# Altium PCB main.PcbDoc
Units mm, origin at the board's own origin, x right, y up, seen from the top; angles counter-clockwise.
Board outline 32.6 x 32.8 mm, 2 copper layers (Top Layer, Bottom Layer); 4 components, 6 nets, 20 pads, 0 vias.
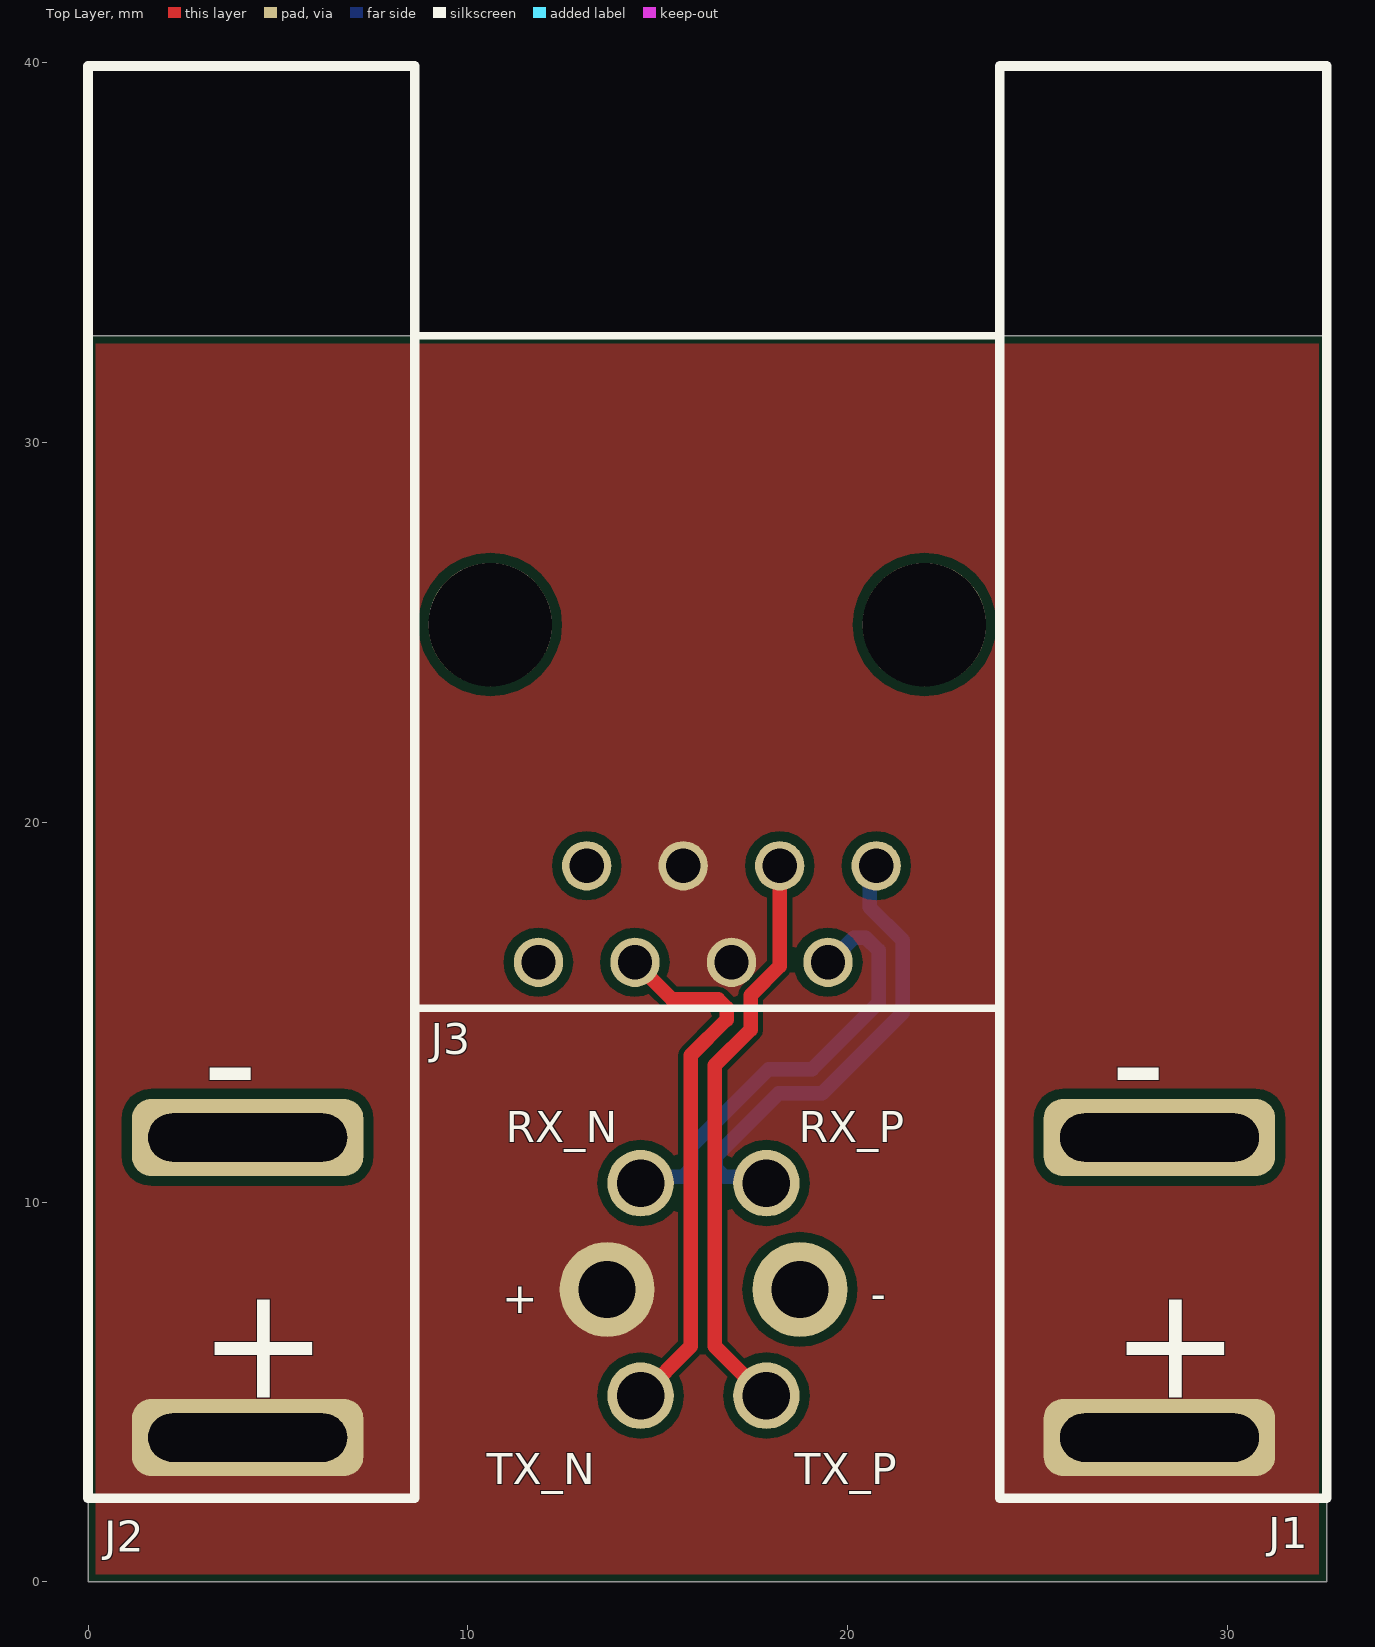
[diagram p0: Top Layer view]
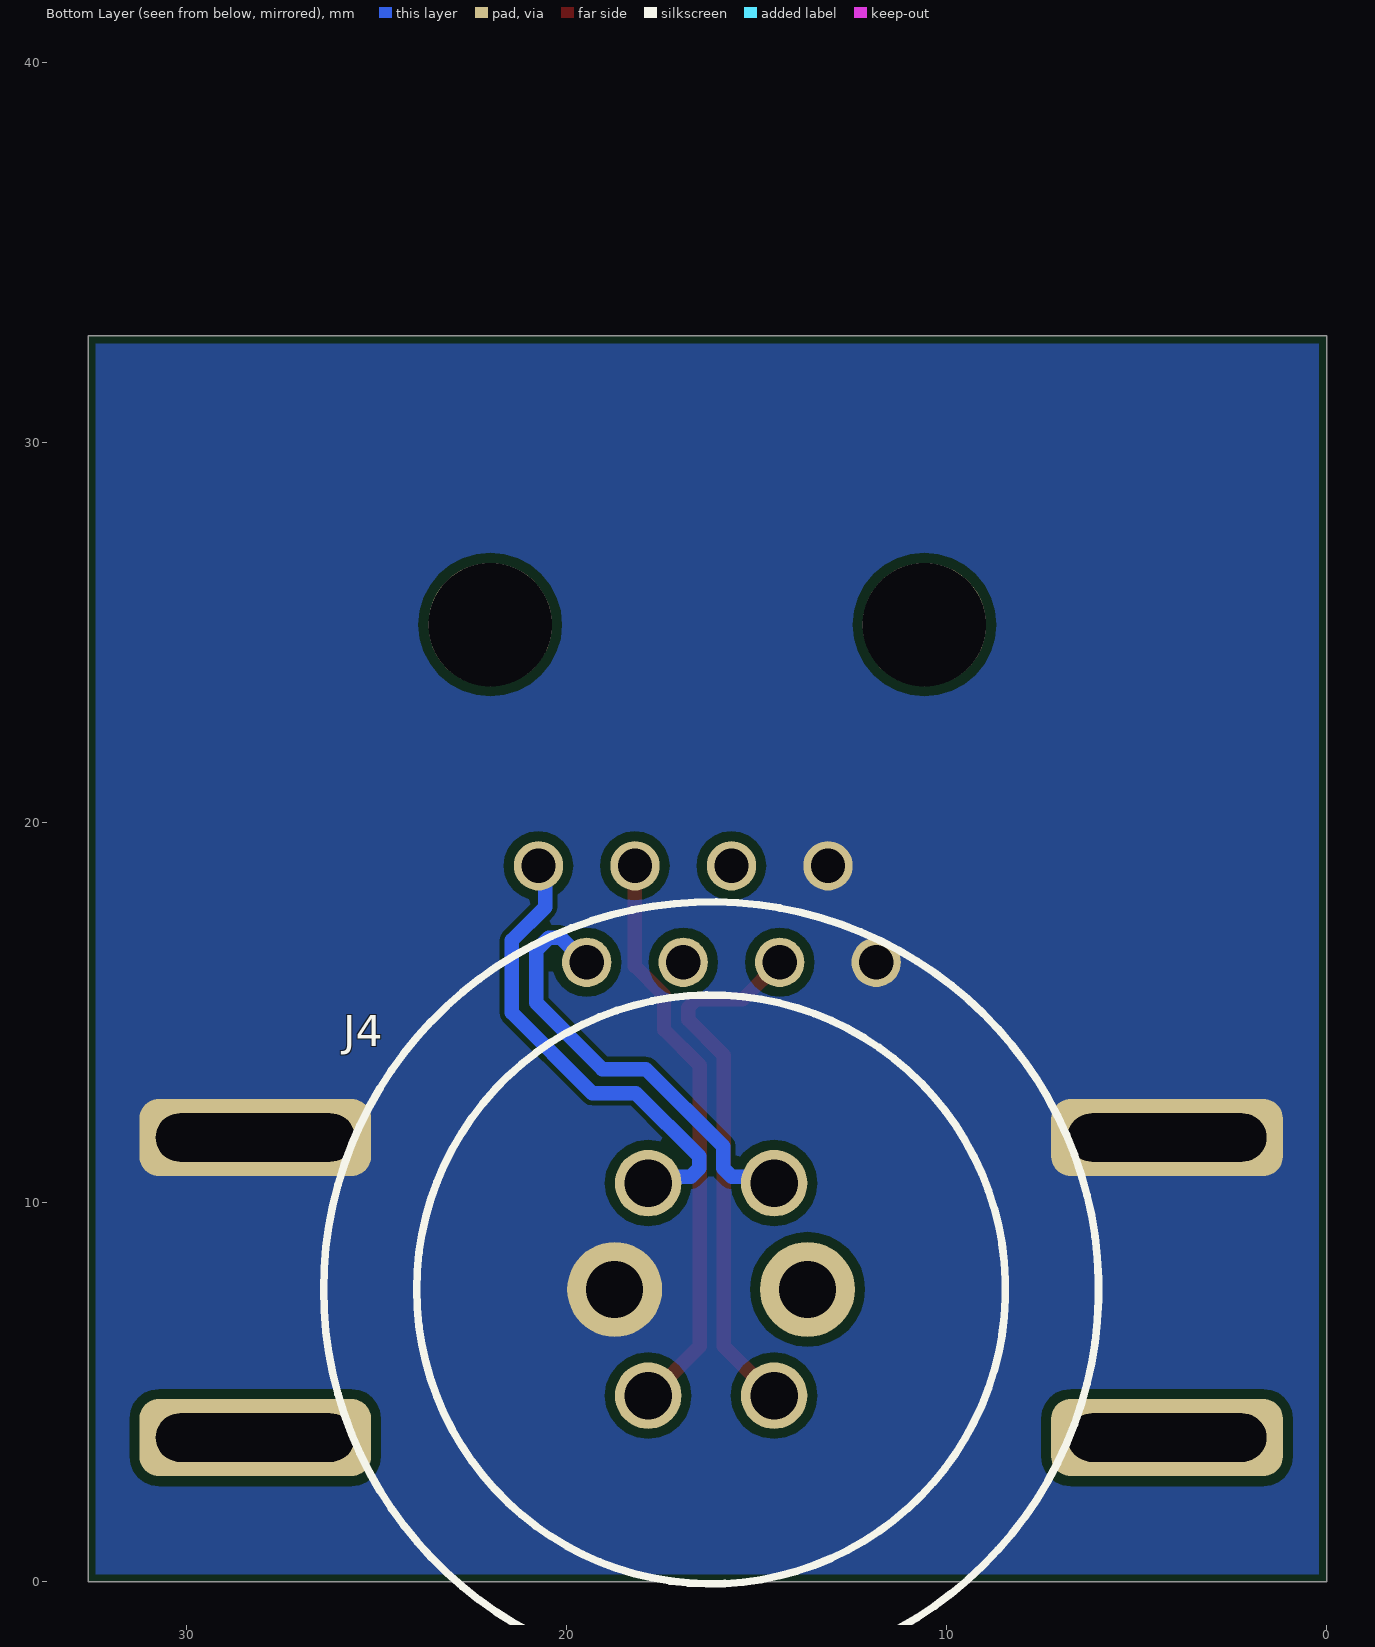
[diagram p1: Bottom Layer view, seen from below]
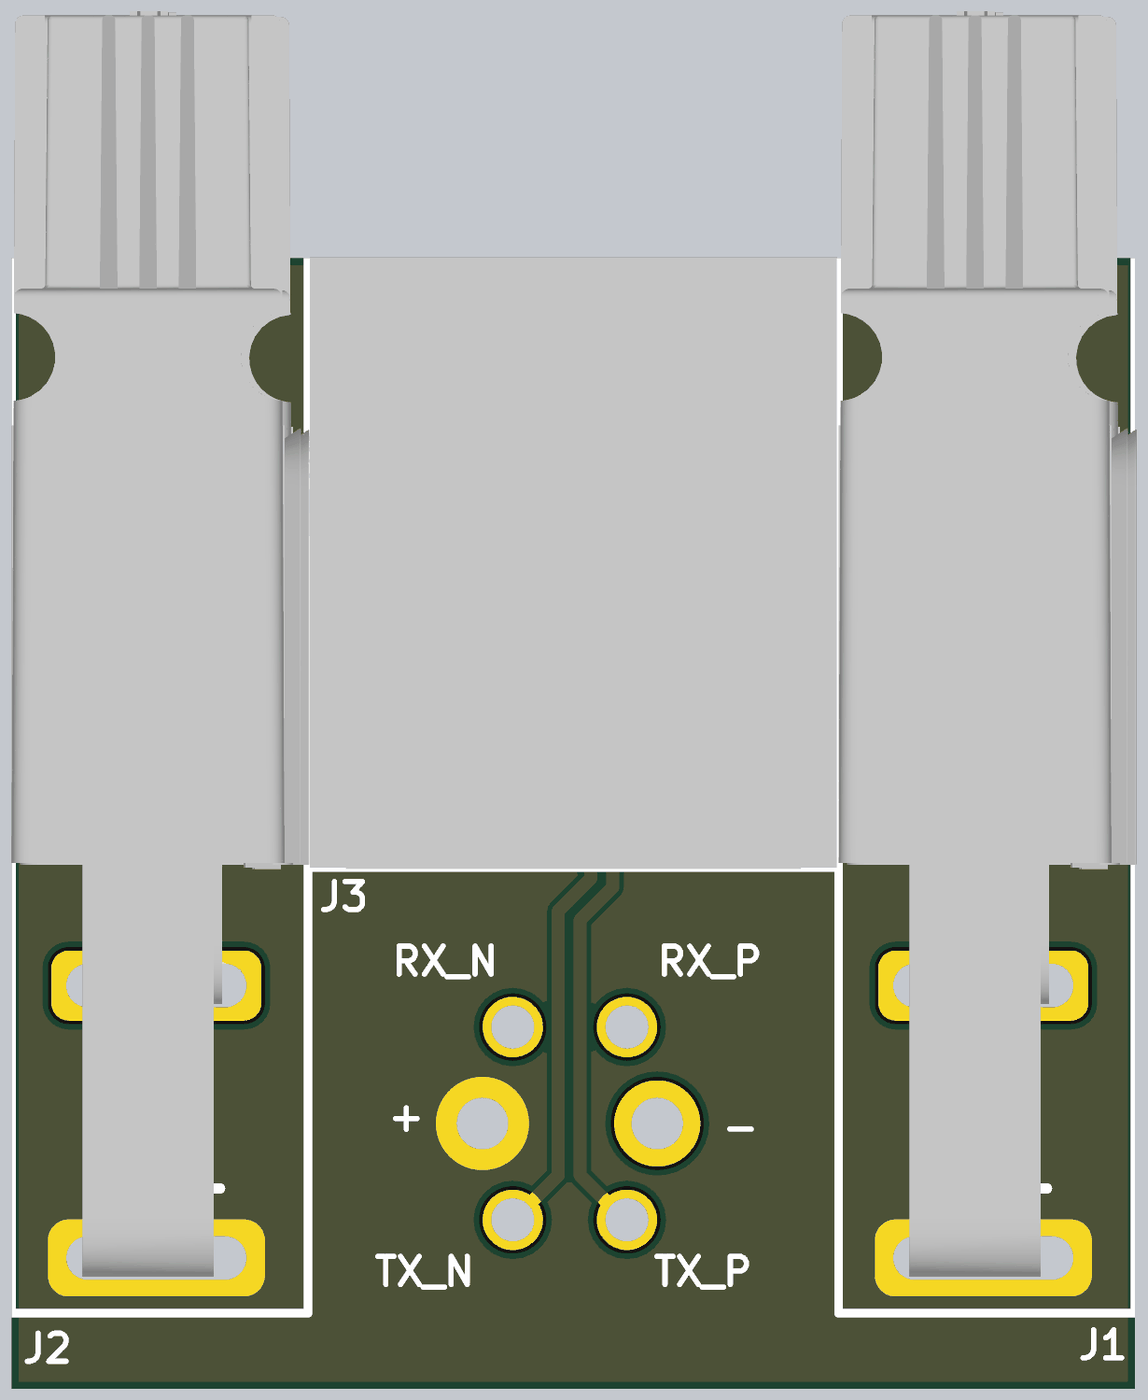
[diagram p2: 3D render of the assembled board from above, using the file's embedded part models]

## Layer stack, top to bottom
Top Solder: solder mask 0.0102, Solder Resist, Dk 3.5
Top Layer: signal copper 0.0356
Dielectric 1: dielectric 0.32, FR-4, Dk 4.8
Bottom Layer: signal copper 0.0356
Bottom Solder: solder mask 0.0102, Solder Resist, Dk 3.5

## Board outline
0,0 0,32.8 32.6,32.8 32.6,0

## Design rules (kind name [scope] priority, off if disabled: settings)
BoardOutlineClearance JLC_BoardOutlineClearance_Silk [OnLayer('Top Overlay')  or   OnLayer('Bottom Overlay')] p1: gap=0 ignorepadtopadclearanceinfootprint=FALSE
BoardOutlineClearance JLC_BoardOutlineClearance_Single [All] p2: gap=0.4 ignorepadtopadclearanceinfootprint=FALSE except(0: Arc-SplitContinuation Track-SplitContinuation SMDPad-SplitContinuation THPad-SplitContinuation Via-SplitContinuation Fill-SplitContinuation Poly-SplitContinuation Region-SplitContinuation Text-SplitContinuation; 0.2: Arc-OutlineEdge Track-OutlineEdge SMDPad-OutlineEdge THPad-OutlineEdge Via-OutlineEdge Fill-OutlineEdge Poly-OutlineEdge Region-OutlineEdge Text-OutlineEdge)
BoardOutlineClearance JLC_BoardOutlineClearance_Panel [All] p3: gap=0.4 ignorepadtopadclearanceinfootprint=FALSE except(0: Arc-SplitContinuation Track-SplitContinuation SMDPad-SplitContinuation THPad-SplitContinuation Via-SplitContinuation Fill-SplitContinuation Poly-SplitContinuation Region-SplitContinuation Text-SplitContinuation)
Clearance JLC_Clearance_SB [(HasFootprint('0603 Solder Bridge-Footprint-1'))] p1: gap=0.127 ignorepadtopadclearanceinfootprint=FALSE except(0: Fill-Hole Poly-Hole Region-Hole Text-Hole; 0.254: SMDPad-Fill SMDPad-Poly SMDPad-Region THPad-Fill THPad-Poly THPad-Region Via-Fill Via-Poly Via-Region)
Clearance JLC_Clearance_Top [All] p2: gap=0.127 ignorepadtopadclearanceinfootprint=FALSE except(0: Fill-Hole Poly-Hole Region-Hole Text-Hole; 0.254: SMDPad-Fill SMDPad-Poly SMDPad-Region THPad-Fill THPad-Poly THPad-Region Via-Fill Via-Poly Via-Region Fill-Fill Fill-Poly Fill-Region Poly-Poly Poly-Region Region-Region)
ComponentClearance JLC_ComponentClearance [All] p1: gap=0 collisioncheckmode=3 verticalgap=0 showdistances=FALSE
ComponentOrientations JLC_ComponentOrientations [All] p1: allowedrotations=32
DiffPairsRouting [All] p1: maxlimit=0.254 minlimit=0.254 mostfreqgap=0.254 toplayer_minwidth=0.381 toplayer_maxwidth=0.381 toplayer_prefwidth=0.381 bottomlayer_minwidth=0.381 bottomlayer_maxwidth=0.381 bottomlayer_prefwidth=0.381 maxuncoupledlength=12.7
Height JLC_Height [All] p1: minheight=0 maxheight=2539.975 prefheight=12.7
HoleSize JLC_HoleSize [All] p1: absolutevalues=TRUE maxlimit=1000 minlimit=0.305 maxpercent=80.000 minpercent=20.000
HoleToHoleClearance JLC_HoleToHoleClearance [All] p1: gap=0.305 allowstackedmicrovias=TRUE
MinimumAnnularRing JLC_MinimumAnnularRing [All] p1: minimumring=0.076
MinimumSolderMaskSliver JLC_MinimumSolderMaskSliver [All] p1: minsoldermaskwidth=0
PolygonConnect [All] p1: connectstyle=Relief reliefconductorwidth=0.254 reliefentries=4 polygonreliefangle="90 Angle" airgapwidth=0.254
RoutingVias JLC_RoutingVias [All] p1: holewidth=0.381 width=0.635 viastyle="Through Hole" minholewidth=0.305 minwidth=0.61 maxholewidth=6.299 maxwidth=12.7
SilkToSilkClearance JLC_SilkToSilkClearance [All] p1: silktosilkclearance=0
SilkToSolderMaskClearance JLC_SilkToSolderMaskClearance [IsPad] p1: minsilkscreentomaskgap=0 clearancetoexposedcopper=TRUE
SolderMaskExpansion [All] p1: expansion=0.102 istentingtop=FALSE
Width JLC_Width [All] p1: maxlimit=12.7 minlimit=0.127 preferedwidth=0.254
22 further rules are at their usual default settings.

## Classes and differential pairs
differential pair TX: +TX_P -TX_N
differential pair RX: +RX_P -RX_N

## Components (designator, comment, footprint, x,y, rotation, side; value= is the part's Value field where it differs from the comment)
J1 "pp45 1x2 horz" "CONN PP45 1x2P HORZ" 28.2,11.7 r180 top
J2 "pp45 1x2 horz" "CONN PP45 1x2P HORZ" 4.2,11.7 r180 top
J3 "rj45 horz unshld" "CONN RJ45 HORZ UNSHLD" 16.3,25.2 r180 top
J4 "miniconx 4+6p" "CONN MINICONX 4+2P" 16.2,7.7 r180 bottom

## Footprints (in the part's own frame and the unit in brackets; to place one, negate y for a bottom-side part, rotate by r counter-clockwise, add the part's x,y. Pads: shape width x height; smd on the part's side, far side on the other; paste and mask are expansions set on the pad)
"CONN MINICONX 4+2P" [mm]
  round 2.5 hole 1.5: 1(-2.537,0) 2(2.537,0)
  round 1.75 hole 1.25: 3(-1.657,2.796) 4(-1.657,-2.796) 5(1.657,-2.796) 6(1.657,2.796)
  silkscreen extent -10.2,-10.2 10.2,10.2, body extent -10.2,-10.2 10.2,10.2, height 17.8
"CONN PP45 1x2P HORZ" [mil] "PowerPole45 vertical"
  rrect50% 240x80 hole 50 slot 206 at 0 deg: 1(0,0) 2(0,311.02)
  silkscreen extent -173,-1110 165,374, body extent -175,-1113 165,332, height 643
"CONN RJ45 HORZ UNSHLD" [mm]
  round 1.3 hole 0.9: 1(-4.445,6.35) 2(-3.175,8.89) 3(-1.905,6.35) 4(-0.635,8.89) 5(0.635,6.35) 6(1.905,8.89) 7(3.175,6.35) 8(4.445,8.89)
  round 3.25 hole 3.25 unplated: ""(-5.715,0) ""(5.715,0)
  silkscreen extent -7.7,-7.6 7.7,10.1, body extent -7.65,-7.62 7.65,10.12, height 12.71

## Part data
J1 J2: library part "CONN pp45 1x2 horz", "Heavy Duty Power Connectors PCB45 HORIZ (TOP) RA LP CONT.", Current Rating=45A, Manufacturer 1="Anderson Power", Manufacturer Part Number 1=1337G1, Supplier Part Number 1=2243-1337G1-ND, Voltage Rating=250V, Category=Connectors, ComponentLink1Description=https://datasheet.ciiva.com/18408/70162076-18408970.pdf?src-supplier=Allied+Electronics, ComponentLink1URL=https://datasheet.ciiva.com/18408/70162076-18408970.pdf?src-supplier=Allied+Electronics, ComponentLink2Description=http://datasheet.octopart.com/1337G1-Anderson-Power-datasheet-41191667.pdf?src-supplier=Farnell, ComponentLink2URL=http://datasheet.octopart.com/1337G1-Anderson-Power-datasheet-41191667.pdf?src-supplier=Farnell, ComponentLink3Description=http://datasheet.octopart.com/1337G1-Anderson-Power-datasheet-64289295.pdf?src-supplier=Element14, ComponentLink3URL=http://datasheet.octopart.com/1337G1-Anderson-Power-datasheet-64289295.pdf?src-supplier=Element14, ComponentLink4Description=http://datasheet.octopart.com/1337G1-Anderson-Power-datasheet-9566536.pdf?src-supplier=Allied+Electronics, ComponentLink4URL=http://datasheet.octopart.com/1337G1-Anderson-Power-datasheet-9566536.pdf?src-supplier=Allied+Electronics, ComponentLink5Description=http://datasheet.octopart.com/1337G1-Anderson-Power-datasheet-41232158.pdf?src-supplier=Allied+Electronics, ComponentLink5URL=http://datasheet.octopart.com/1337G1-Anderson-Power-datasheet-41232158.pdf?src-supplier=Allied+Electronics, ComponentLink6Description=http://datasheet.octopart.com/1337G1-Anderson-Power-datasheet-103682810.pdf?src-supplier=Allied+Electronics, ComponentLink6URL=http://datasheet.octopart.com/1337G1-Anderson-Power-datasheet-103682810.pdf?src-supplier=Allied+Electronics, Contact Material=Copper, Contact Plating=Tin, Gender=Female, Mount="Through Hole", Pricing 1="1=1.22000, 10=1.07100, 25=1.00800, 50=0.96600, 100=0.92400, 250=0.84000, 500=0.75600, 1000=0.67200, 2500=0.60900 (USD)", REACH SVHC="No SVHC", Stock 1=835, Supplier 1=Digi-Key, Supplier 2=Digi-Key, Supplier Part Number 2=2243-1336G1-ND, Termination="Through Hole"
J3: library part "CONN rj45 horz unshld", "CONN MOD JACK 8P8C R/A UNSHLD", Color=Black, Contact Resistance=20mR, Current Rating=1A, Flammability Rating="UL94 V-0", Insulation Resistance=500MR, Manufacturer 1="Amphenol FCI", Manufacturer Part Number 1=54602-908LF, Max Operating Temperature=70°C, Min Operating Temperature=-40°C, Package Quantity=200, Supplier Part Number 1=609-1046-ND, Voltage Rating=1kV, Category="Modular / Ethernet Connectors", ComponentLink1Description=https://datasheet.ciiva.com/7629/1637015-7629184.pdf?src-supplier=Element14, ComponentLink1URL=https://datasheet.ciiva.com/7629/1637015-7629184.pdf?src-supplier=Element14, ComponentLink2Description=https://datasheet.ciiva.com/685/c-bmj-0102-685432.pdf?src-supplier=Digi-Key, ComponentLink2URL=https://datasheet.ciiva.com/685/c-bmj-0102-685432.pdf?src-supplier=Digi-Key, ComponentLink3Description=https://datasheet.ciiva.com/16945/70236834-16945799.pdf?src-supplier=Allied+Electronics, ComponentLink3URL=https://datasheet.ciiva.com/16945/70236834-16945799.pdf?src-supplier=Allied+Electronics, ComponentLink4Description=https://datasheet.ciiva.com/15170/getdatasheetpartid-177828-15170746.pdf?src-supplier=Verical, ComponentLink4URL=https://datasheet.ciiva.com/15170/getdatasheetpartid-177828-15170746.pdf?src-supplier=Verical, Connector Type=Jack,RJ45, Contact Material="Copper Alloy,Copper,Bronze", Contact Plating=Gold, Depth=17.74mm, Direction=Down, Gender=Female, Housing Color=Black, Housing Material=Polyester, Lead Free="Lead Free", Length=15.3mm, Mount="Through Hole", Number of Contacts=8, Number of Ports=1, Number of Positions=8, Number of Positions Loaded=8, Number of Rows=1, Orientation="Right Angle", Packaging=Bulk, Pitch=2.54mm, Pricing 1="1=0.62000, 10=0.58100, 25=0.52280, 50=0.46460, 100=0.44530, 250=0.40656, 500=0.38720, 1000=0.31944, 2500=0.29040 (USD)", Radiation Hardening=No, REACH SVHC="No SVHC", RoHS=Yes, Shielding=Unshielded, Stock 1=40515, Supplier 1=Digi-Key, Termination="Through Hole", Width=15.3mm
J4: library part "CONN miniconx 4+2p vert", "Standard Circular Connector PosLck Pnl Mnt#16#22 PC Cont 6MPins 300", Manufacturer 1=Switchcraft, Manufacturer Part Number 1=W7C81-6PG-P-300, Supplier Part Number 1=468-W7C81-6PG-P-300-ND, ComponentLink1Description=http://datasheet.octopart.com/W7C81-6PG-P-300-Conxall-datasheet-139885749.pdf?src-supplier=Sager+Electronics, ComponentLink1URL=http://datasheet.octopart.com/W7C81-6PG-P-300-Conxall-datasheet-139885749.pdf?src-supplier=Sager+Electronics, Pricing 1="25=8.98000 (USD)", Supplier 1=Digi-Key

## Nets (pads, with @x,y where several pads share a name; then routed paths per layer and width w, separated by ;. In a path a pad name is that pad's centre, name@x,y a point inside that pad or via, vN(x,y) a via of type N, cw(c..) or ccw(c..) an arc to the next point about the centre after c; other vN are vias at no path point)
GND: J1.1 J2.1 J3.7 J3.8 J4.1
HV: J1.2 J2.2 J3.4 J3.5 J4.2
RX_N: J3.2 J4.6 | length 11.7
  Bottom Layer w0.381: J4.6 14.71,10.663 15.659,10.663 15.883,10.887 15.883,11.465 17.918,13.501 19.066,13.501 20.807,15.242 20.807,16.624 20.473,16.957 20.158,16.957 19.511,16.31 J3.2
RX_P: J3.1 J4.3 | length 12.6
  Bottom Layer w0.381: J4.3 17.69,10.663 16.741,10.663 16.518,10.887 16.518,11.202 18.181,12.866 19.329,12.866 21.442,14.978 21.442,16.887 20.569,17.759 20.569,18.674 J3.1
TX_N: J3.6 J4.5 | length 14.1
  Top Layer w0.381: J3.6 15.363,15.342 16.582,15.342 16.806,15.119 16.806,14.804 15.865,13.863 15.865,6.2 14.569,4.904 J4.5
TX_P: J3.3 J4.4 | length 15.3
  Top Layer w0.381: J4.4 17.796,4.904 16.5,6.2 16.5,13.6 17.441,14.541 17.441,15.447 18.205,16.212 J3.3
pads on no net: J3.

## Polygon pours and split planes (outlines as drawn)
GND on Bottom Layer "GND_L02_P001" (solid, remove dead copper, pour order 1): 0,0 32.6,0 32.6,32.8 0,32.8
HV on Top Layer "HV_L01_P000" (solid, remove dead copper, pour order 0): 0,0 32.6,0 32.6,32.8 0,32.8

## Silkscreen, mask and mechanical layers (free items; w line width, h text height)
Top Overlay:
  text "-" at 3,12.25 h3
  text "-" at 26.9,12.25 h3
  text "RX_N" at 11,11.574 h0.81
  text "RX_P" at 18.7,11.574 h0.81
  text "-" at 20.6,7.177 h0.81
  text "+" at 10.9,7.074 h0.81
  text "+" at 2.9,4.85 h3
  text "+" at 26.9,4.85 h3
  text "TX_N" at 10.5,2.574 h0.81
  text "TX_P" at 18.6,2.574 h0.81
Mechanical 1:
  the board outline again, w0.25